# Altium PCB CSWrite3-SW-V1.1.PcbDoc
Units mm, origin at the board's own origin, x right, y up, seen from the top; angles counter-clockwise.
Board outline 100 x 80 mm, 4 copper layers (Top Layer, power, gnd, Bottom Layer), stack 0.778 mm thick; 11 components, 181 nets, 126 pads, 135 vias.
Unrouted connection lines stored in the file: 17.
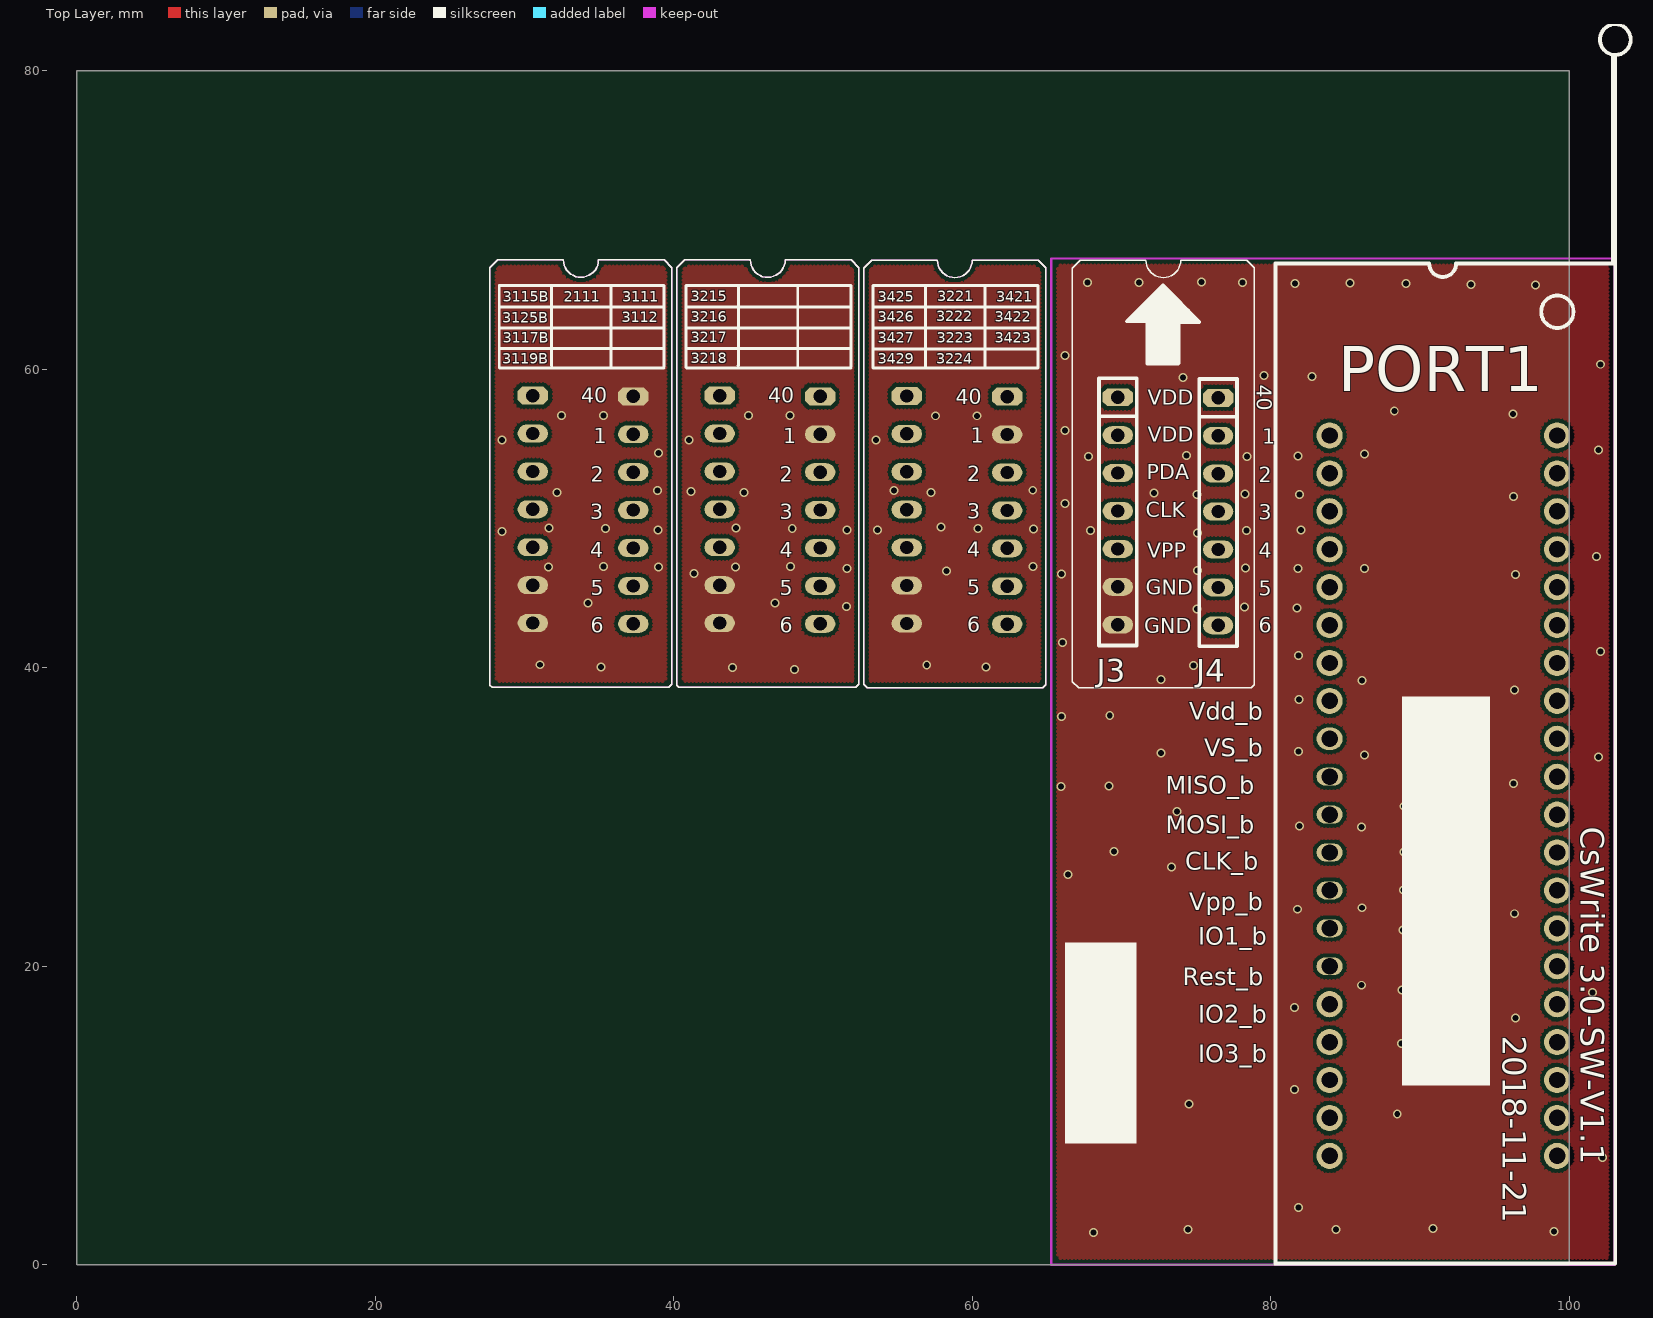
[diagram p0: Top Layer view]
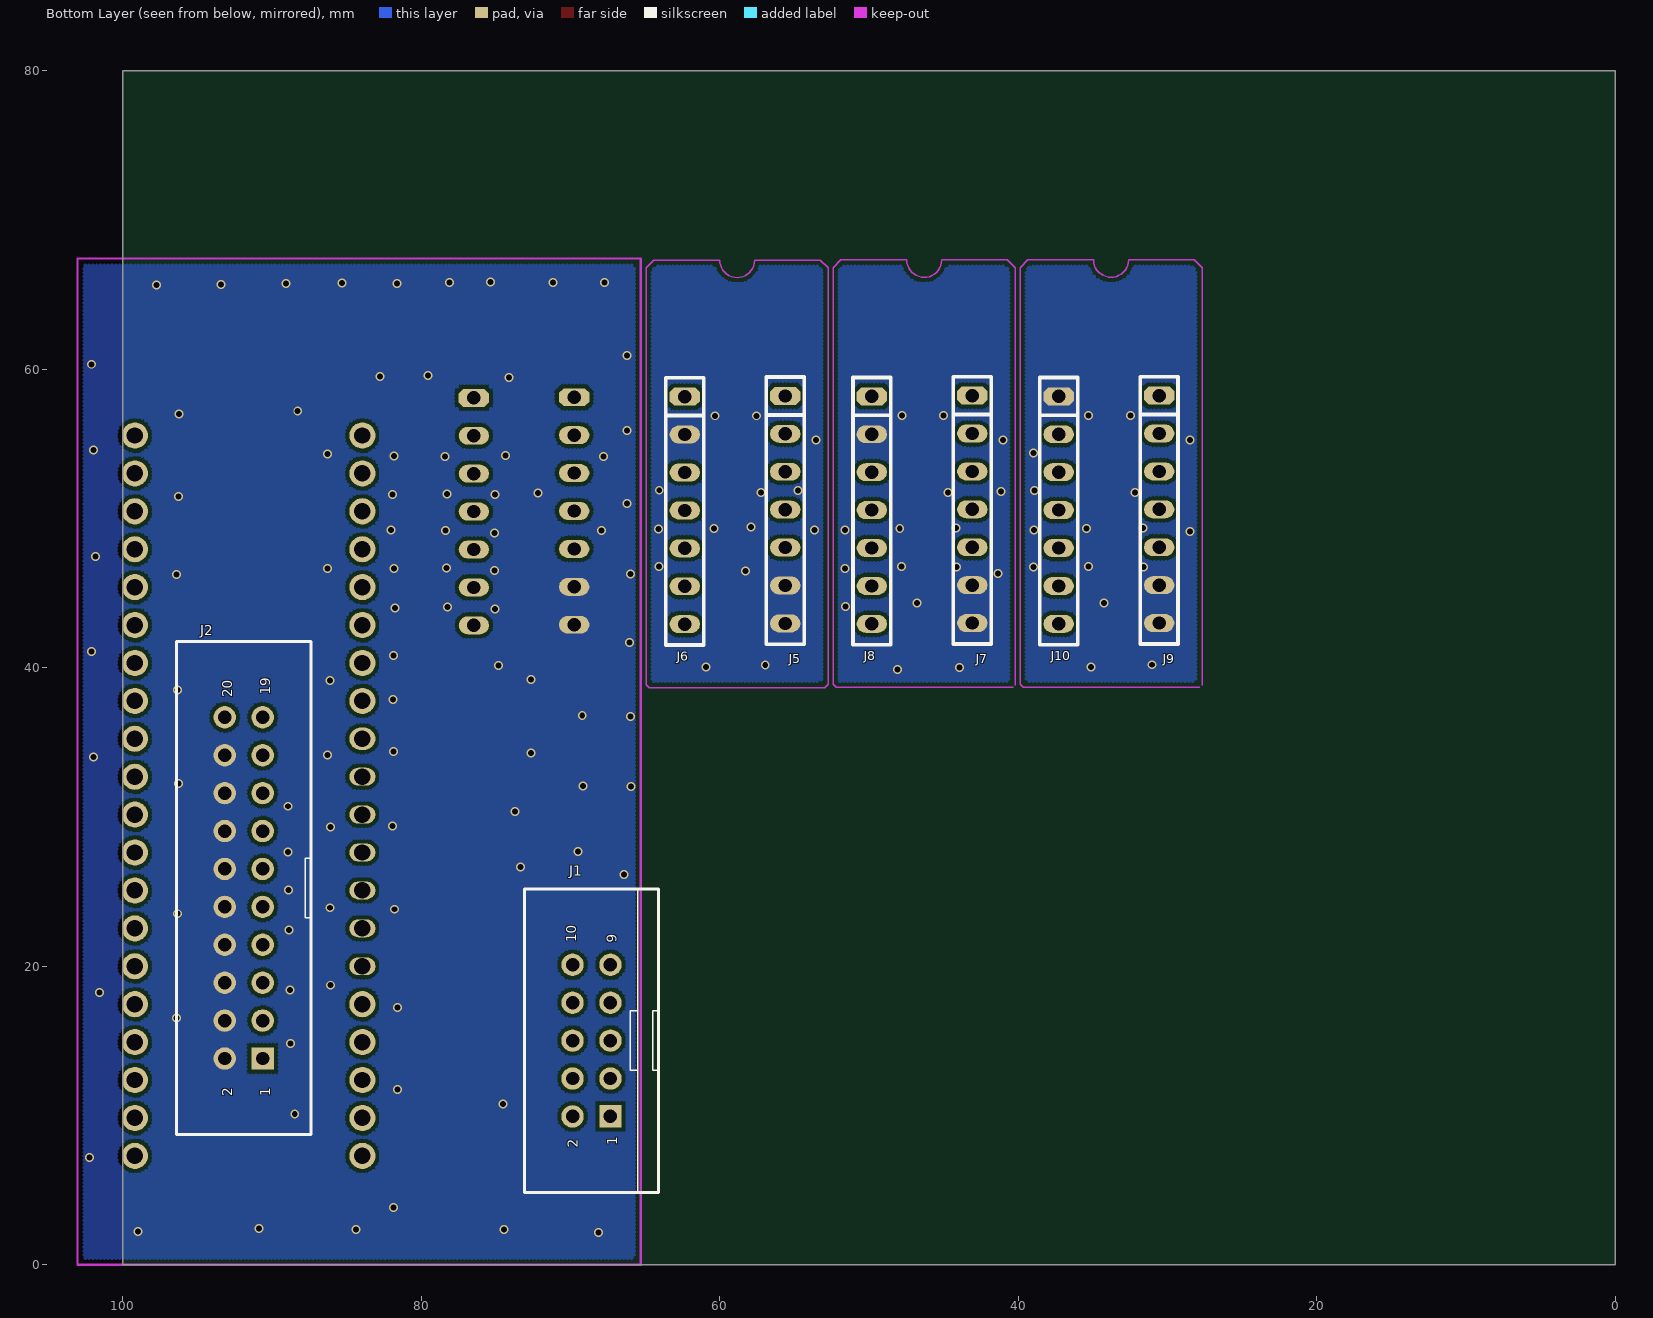
[diagram p1: Bottom Layer view, seen from below]
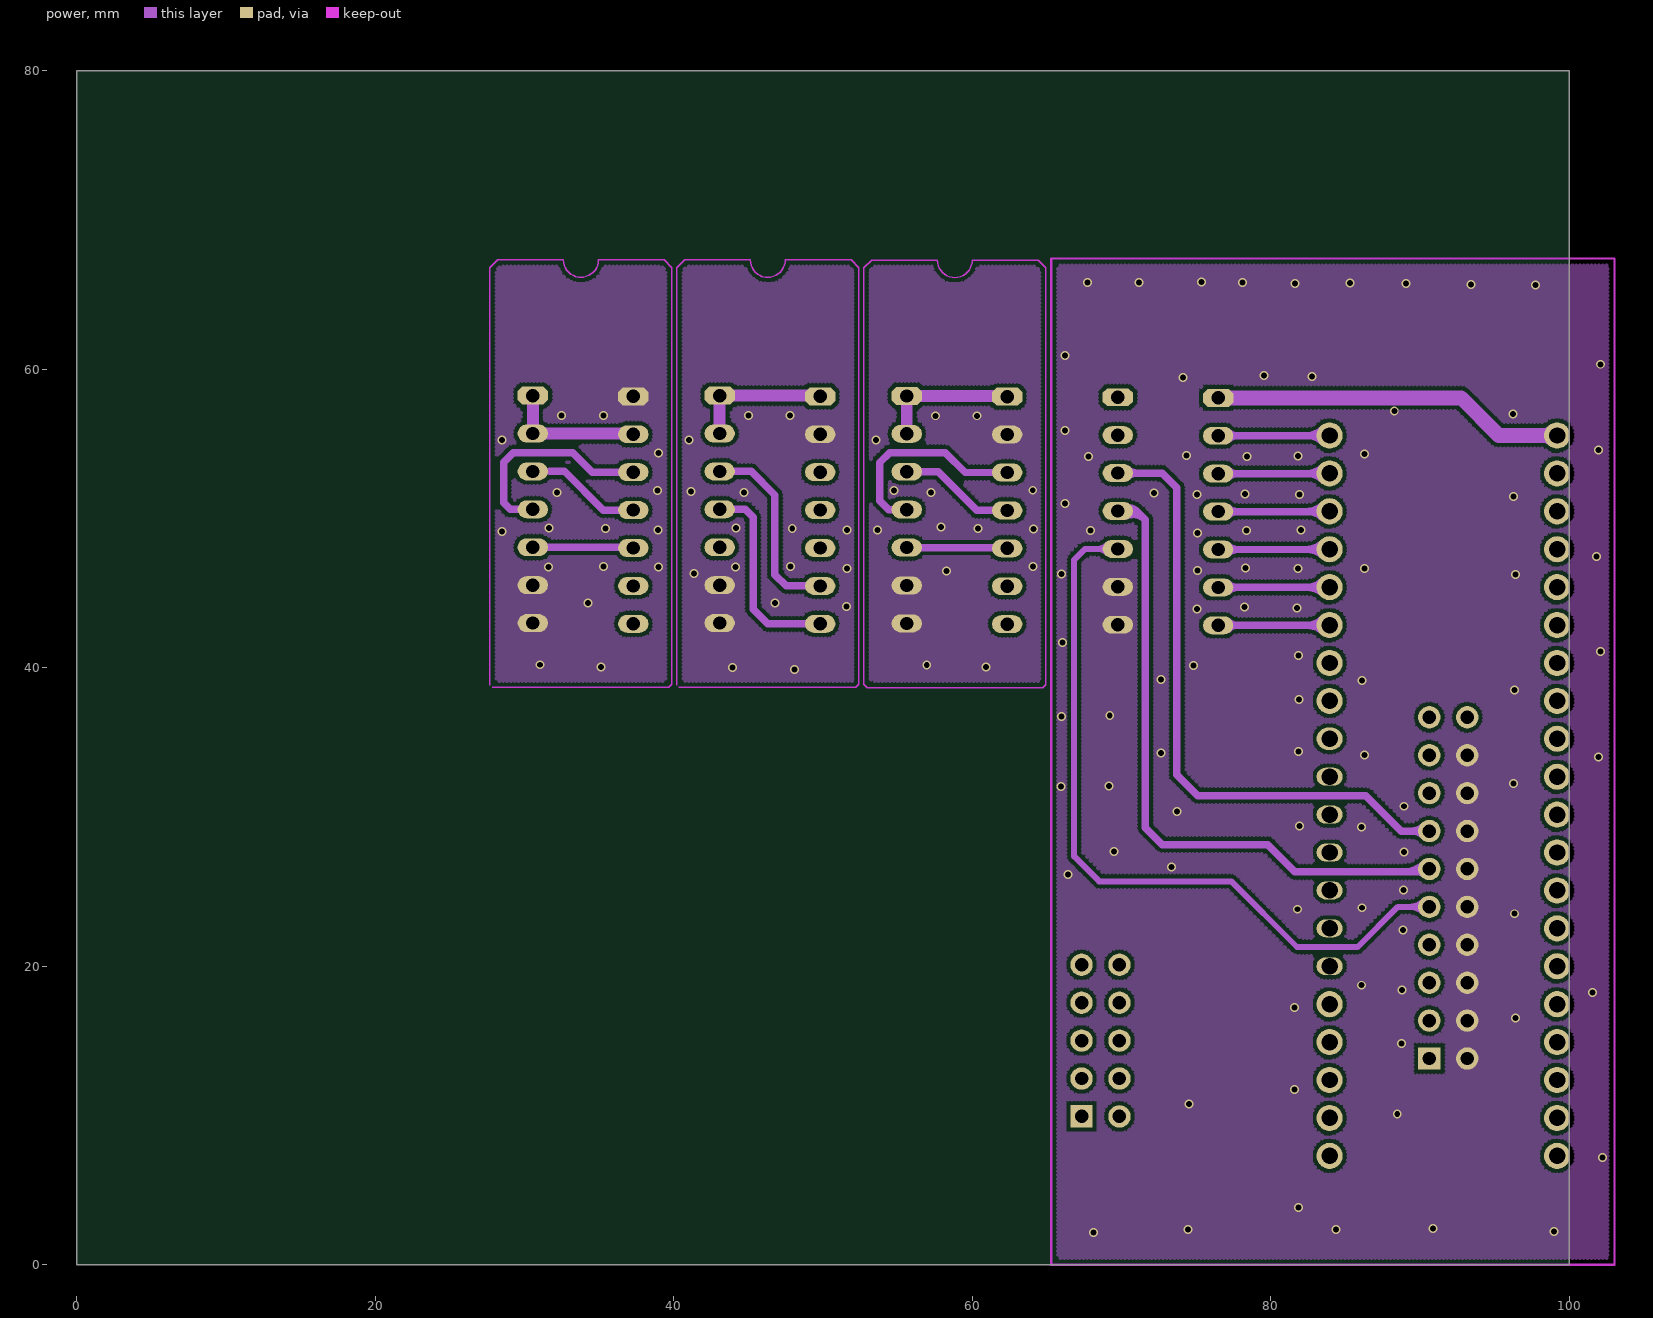
[diagram p2: power]
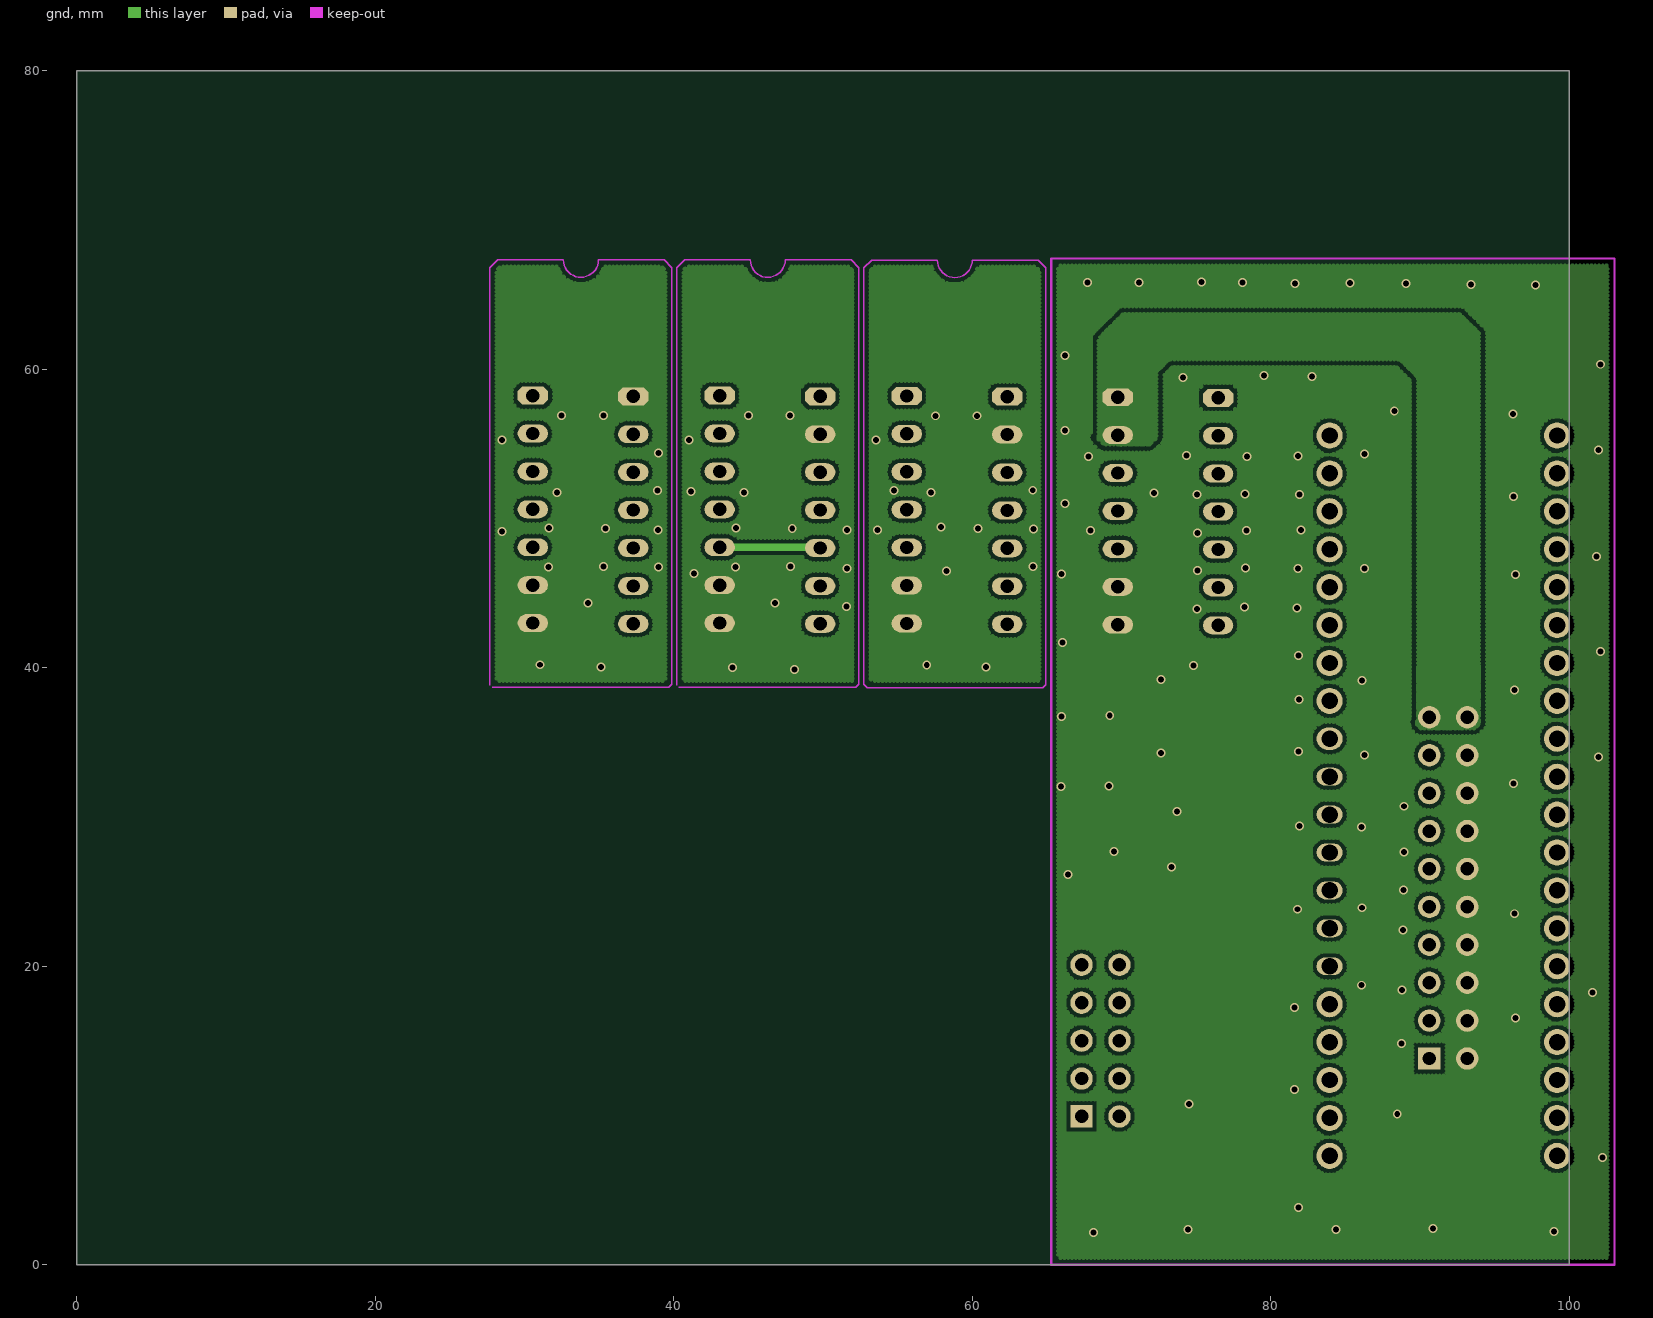
[diagram p3: gnd]

## Layer stack, top to bottom
Top Layer: signal copper 0.0356
Dielectric: core 0.254, FR-4, Dk 4.2
power: signal copper 0.036
Dielectric: prepreg 0.127, Dk 4.2
gnd: signal copper 0.036
Dielectric: core 0.254, Dk 4.2
Bottom Layer: signal copper 0.0356

## Board outline
0,0 100,0 100,80 0,80

## Design rules (kind name [scope] priority, off if disabled: settings)
Clearance [All] p1: gap=0.254
ComponentClearance [All] p1 off: gap=0 collisioncheckmode=3 verticalgap=0 showdistances=FALSE
HoleSize [All] p1: absolutevalues=TRUE maxlimit=7.5 minlimit=0.025 maxpercent=80.000 minpercent=20.000
HoleToHoleClearance [All] p1: gap=0 allowstackedmicrovias=TRUE
MinimumSolderMaskSliver [All] p1: minsoldermaskwidth=0
PlaneConnect [All] p1: planeconnectstyle=Direct reliefexpansion=0.508 reliefentries=4 reliefconductorwidth=0.254 reliefairgap=0.254
PolygonConnect [All] p1: connectstyle=Direct reliefconductorwidth=0.254 reliefentries=4 polygonreliefangle="45 Angle" airgapwidth=0.254
RoutingVias RoutingVias_1 [All] p1: holewidth=0.711 width=1.27 viastyle="Through Hole" minholewidth=0.3 minwidth=0.5 maxholewidth=0.711 maxwidth=1.27
RoutingVias [All] p2: holewidth=0.6 width=1 viastyle="Through Hole" minholewidth=0.4 minwidth=0.6 maxholewidth=10 maxwidth=10
SilkToSilkClearance [All] p1: silktosilkclearance=0
SilkscreenOverComponentPads [IsPad] p1: minsilkscreentomaskgap=0
SolderMaskExpansion [All] p1: expansion=0.102
Width [All] p1: maxlimit=10 minlimit=0.254 preferedwidth=0.4
21 further rules are at their usual default settings.

## Classes and differential pairs
component class "CSWrite3.0.1 V0.51": BAT+1 BAT-1 C5 DCin F1

## Components (designator, comment, footprint, x,y, rotation, side; value= is the part's Value field where it differs from the comment)
J1 "扩展口" IDC10-GZ 68.59,15.01 r90 bottom locked (schematic designator J2)
J2 "烧录口" IDC20 91.89,25.24 r90 bottom locked (schematic designator J3)
J3 "DIP7" SIP7 69.75,58.11 r270 top
J4 "DIP7" SIP7 76.47,58.07 r270 top
J5 "DIP7" SIP7 55.61,58.2 r270 bottom
J6 "DIP7" SIP7 62.34,58.15 r270 bottom
J7 "DIP7" SIP7 43.08,58.22 r270 bottom
J8 "DIP7" SIP7 49.81,58.17 r270 bottom
J9 "DIP7" SIP7 30.56,58.22 r270 bottom
J10 "DIP7" SIP7 37.29,58.17 r270 bottom
PORT1 "IC40" DIP40_A 91.56,31.42 r180 top locked

## Footprints (in the part's own frame and the unit in brackets; to place one, negate y for a bottom-side part, rotate by r counter-clockwise, add the part's x,y. Pads: shape width x height; smd on the part's side, far side on the other; paste and mask are expansions set on the pad)
DIP40_A [mm]
  round 1.75 hole 1.1: 1(-7.62,-24.13) 2(-7.62,-21.59) 3(-7.62,-19.05) 4(-7.62,-16.51) 5(-7.62,-13.97) 6(-7.62,-11.43) 7(-7.62,-8.89) 8(-7.62,-6.35) 9(-7.62,-3.81) 10(-7.62,-1.27) 11(-7.62,1.27) 12(-7.62,3.81) 13(-7.62,6.35) 14(-7.62,8.89) 15(-7.62,11.43) 16(-7.62,13.97) 17(-7.62,16.51) 18(-7.62,19.05) 19(-7.62,21.59) 20(-7.62,24.13) 21(7.62,24.13) 22(7.62,21.59) 23(7.62,19.05) 24(7.62,16.51) 25(7.62,13.97) 33(7.62,-6.35) 34(7.62,-8.89) 35(7.62,-11.43) 36(7.62,-13.97) 37(7.62,-16.51) 38(7.62,-19.05) 39(7.62,-21.59) 40(7.62,-24.13)
  oval 1.75x1.2 hole 1.1: 26(7.62,11.43) 27(7.62,8.89) 28(7.62,6.35) 29(7.62,3.81) 30(7.62,1.27) 31(7.62,-1.27)
  oval 1.75x1.5 hole 1.1: 32(7.62,-3.81)
  silkscreen extent -12.55,-51.68 11.24,31.35
IDC10-GZ [mm]
  rect 1.5x1.5 hole 0.9: 1(-5.08,-1.27)
  round 1.5 hole 0.9: 2(-5.08,1.27) 3(-2.54,-1.27) 4(-2.54,1.27) 5(0,-1.27) 6(0,1.27) 7(2.54,-1.27) 8(2.54,1.27) 9(5.08,-1.27) 10(5.08,1.27)
  silkscreen extent -10.17,-4.51 10.17,4.5, body extent -10.37,-4.52 10.23,4.28, height 9.1
IDC20 [mm]
  rect 1.5x1.5 hole 0.9: 1(-11.43,-1.27)
  round 1.5 hole 0.9: 2(-11.43,1.27) 3(-8.89,-1.27) 4(-8.89,1.27) 5(-6.35,-1.27) 6(-6.35,1.27) 7(-3.81,-1.27) 8(-3.81,1.27) 9(-1.27,-1.27) 10(-1.27,1.27) 11(1.27,-1.27) 12(1.27,1.27) 13(3.81,-1.27) 14(3.81,1.27) 15(6.35,-1.27) 16(6.35,1.27) 17(8.89,-1.27) 18(8.89,1.27) 19(11.43,-1.27) 20(11.43,1.27)
  silkscreen extent -16.52,-4.5 16.52,4.5
SIP7 [mil]
  oct 47.24x80 hole 35: 1(0,0)
  oval 47.24x80 hole 35: 2(100,0) 3(200,0) 4(300,0) 5(400,0) 6(500,0) 7(600,0)
  silkscreen extent -50,-50 655,50

## Part data
J1: library part Con5x2

## Via types
v1: diameter 0.6, hole 0.4, Top Layer to Bottom Layer, 135 vias

## Nets (pads, with @x,y where several pads share a name; then routed paths per layer and width w, separated by ;. In a path a pad name is that pad's centre, name@x,y a point inside that pad or via, vN(x,y) a via of type N, cw(c..) or ccw(c..) an arc to the next point about the centre after c; other vN are vias at no path point)
3.3V: J1.9
5V: 
5V-b: 
12V: 
AD-5V: 
AD-12V: 
AD-Pin1: 
AD-Pin2: 
AD-Pin3: 
AD-Pin4: 
AD-Pin5: 
AD-Pin6: 
AD-Pin7: 
AD-Pin8: 
AD-Vdd: 
AD-Vpp: 
AD-VS: 
AD-VS-b: 
AGND: 
BL: 
Boot0: 
Busy: 
Buzzer: 
CLK-a: 
CLK-b: 
D0: J4.2 PORT1.40 | length 11.1
  power w0.5: J4.2 PORT1.40@83.92,55.53 ; J4.2@77.133,55.283 cw(c77.731,54.685) 77.731,55.53 cw(c77.731,56.375) J4.2@77.133,55.777 ; 82.383,55.53 ccw(c82.383,57.107) PORT1.40@83.498,55.992 ; 82.479,55.53 cw(c82.479,54.089) PORT1.40@83.498,55.108
D1: J4.3 PORT1.39 | length 11.1
  power w0.5: J4.3 PORT1.39@83.92,52.99 ; J4.3@77.133,52.743 cw(c77.731,52.145) 77.731,52.99 cw(c77.731,53.835) J4.3@77.133,53.237 ; 82.383,52.99 ccw(c82.383,54.567) PORT1.39@83.498,53.452 ; 82.479,52.99 cw(c82.479,51.549) PORT1.39@83.498,52.568
D2: 
D3: J4.4 PORT1.38 | length 11.1
  power w0.5: J4.4 PORT1.38@83.92,50.45 ; J4.4@77.133,50.203 cw(c77.731,49.605) 77.731,50.45 cw(c77.731,51.295) J4.4@77.133,50.697 ; 82.383,50.45 ccw(c82.383,52.027) PORT1.38@83.498,50.912 ; 82.479,50.45 cw(c82.479,49.009) PORT1.38@83.498,50.028
D4: J4.5 PORT1.37 | length 11.1
  power w0.5: J4.5 PORT1.37@83.92,47.91 ; J4.5@77.133,47.663 cw(c77.731,47.065) 77.731,47.91 cw(c77.731,48.755) J4.5@77.133,48.157 ; 82.383,47.91 ccw(c82.383,49.487) PORT1.37@83.498,48.372 ; 82.479,47.91 cw(c82.479,46.469) PORT1.37@83.498,47.488
D5: J4.6 J6.6 PORT1.36 | length 11.1
  power w0.5: J4.6 PORT1.36@83.92,45.37 ; J4.6@77.133,45.123 cw(c77.731,44.525) 77.731,45.37 cw(c77.731,46.215) J4.6@77.133,45.617 ; 82.383,45.37 ccw(c82.383,46.947) PORT1.36@83.498,45.832 ; 82.479,45.37 cw(c82.479,43.929) PORT1.36@83.498,44.948
D6: J4.7 J6.7 PORT1.35 | length 11.1
  power w0.5: J4.7 PORT1.35@83.92,42.83 ; J4.7@77.133,42.583 cw(c77.731,41.985) 77.731,42.83 cw(c77.731,43.675) J4.7@77.133,43.077 ; 82.383,42.83 ccw(c82.383,44.407) PORT1.35@83.498,43.292 ; 82.479,42.83 cw(c82.479,41.389) PORT1.35@83.498,42.408
D7: J4.1 PORT1.1 | length 25.2
  power w1: J4.1 92.75,58.07 95.27,55.55 PORT1.1 ; PORT1.1@98.915,55.285 ccw(c98.275,54.645) 98.275,55.55 ccw(c98.275,56.455) PORT1.1@98.915,55.815
DA-Vdd: 
DA-Vpp: 
GND: J1.10
GND1: 
GND2: 
GndControl: 
I2C1-DAT: 
I2C1-SCL: 
I2C2-DAT: 
I2C2-SCL: 
IO1-a: 
IO1-b: J2.7
IO2-a: 
IO2-b: J2.3
IO3-a: 
IO3-b: J2.1
KeyMode: 
LCD-CS: 
LCD-DCX: 
LCD-RESET: 
LCD-SCK: 
LCD-SDI: 
LCD-SDO: 
LowPower: 
MISO-a: 
MISO-b: 
MOSI-a: 
MOSI-b: 
NetBusy1_1: 
NetBusy1_3: 
NetBusy1_4: 
NetBusy_1: 
NetBZ1_2: 
NetC1_2: 
NetC3_2: 
NetC5_2: 
NetC7_2: 
NetC8_2: 
NetC10_1: 
NetC11_1: 
NetC18_2: 
NetC27_2: 
NetC29_1: 
NetC31_1: 
NetC32_2: 
NetC37_1: 
NetC47_1: 
NetC56_2: 
NetC60_2: 
NetC63_1: 
NetC65_2: 
NetC66_2: 
NetD1_2: 
NetD2_1: 
NetDZ1_2: 
NetIC3_1: 
NetIC3_7: 
NetIC3_8: 
NetJ1_5: 
NetJ1_13: 
NetJ2_3: J1.7
NetJ2_4: J1.8
NetJ2_5: J1.5
NetJ2_6: J1.6
NetJ2_7: J1.3
NetJ2_8: J1.4
NetJ2_9: J1.1
NetJ2_10: J1.2
NetJ3_4: J2.2 J2.4 J2.6 J2.8 J2.10 J2.12 J2.14 J2.16 J2.18 J3.6 J3.7 J5.6 J5.7 J6.2 J7.6 J7.7 J8.2 J9.6 J9.7 J10.1
  other v1: 68.12,2.17 98.97,2.23 74.46,2.37 84.37,2.37 90.85,2.43 81.86,3.82 102.21,7.19 88.47,10.1 74.53,10.76 81.6,11.75 88.76,14.82 96.398,16.51 81.6,17.23 101.55,18.22 88.8,18.39 86.09,18.72 88.86,22.42 96.33,23.51 81.79,23.81 86.12,23.91 88.9,25.1 66.4,26.15 73.34,26.65 88.93,27.64 69.5,27.67 86.06,29.33 81.92,29.39 73.7,30.35 88.93,30.71 65.95,32.02 69.17,32.07 96.26,32.23 101.95,34.02 86.29,34.15 72.64,34.28 81.86,34.38 65.97,36.73 69.21,36.79 81.89,37.85 96.33,38.51 86.12,39.14 72.64,39.2 48.09,39.86 43.93,40 35.14,40.03 60.91,40.03 74.82,40.13 56.95,40.16 31.05,40.19 81.86,40.82 102.08,41.09 66.03,41.67 75.05,43.93 81.76,43.99 78.23,44.06 51.56,44.09 34.26,44.32 46.78,44.32 96.398,46.24 65.97,46.27 41.35,46.31 58.27,46.47 75.09,46.51 51.6,46.64 81.83,46.64 86.29,46.64 78.29,46.67 31.62,46.73 44.14,46.73 38.98,46.74 35.29,46.76 47.81,46.76 64.07,46.76 101.82,47.43 75.09,49.02 28.5,49.12 67.92,49.182 78.36,49.182 38.94,49.21 51.6,49.21 53.65,49.22 82.03,49.21 64.09,49.29 35.42,49.31 47.94,49.31 60.374,49.33 31.64,49.35 44.16,49.35 57.91,49.41 66.2,51 96.26,51.468 75.05,51.59 81.92,51.59 78.26,51.63 72.16,51.69 57.24,51.72 32.19,51.74 44.71,51.74 41.16,51.79 38.91,51.86 54.742,51.86 64.05,51.88 67.79,54.14 78.39,54.14 81.83,54.17 74.36,54.2 86.29,54.3 38.98,54.37 101.95,54.57 28.5,55.26 41.02,55.26 53.55,55.24 66.2,55.89 32.486,56.89 35.28,56.89 45.006,56.89 47.8,56.89 57.536,56.87 60.33,56.87 96.23,56.98 88.27,57.189 74.13,59.42 82.75,59.49 79.55,59.56 102.08,60.32 66.2,60.91 97.72,65.63 93.42,65.67 81.63,65.73 89.06,65.73 85.3,65.77 67.72,65.8 71.16,65.8 78.09,65.8 75.35,65.83
NetJ3_5: J2.15
NetJ3_7: J2.13 J3.3 J5.3 J6.4 J7.3 J8.6 J9.3 J10.4 | length 72.8
  power w0.5: 31.7,53.14 32.68,53.14 35.27,50.55 J10.4 ; J7.3 45.2,53.14 46.78,51.56 46.78,46.23 47.54,45.47 J8.6 ; J5.3 57.72,53.12 60.31,50.53 J6.4 ; J3.3 72.73,53.03 73.71,52.05 73.71,32.81 75.1,31.42 86.37,31.42 88.74,29.05 J2.13 ; J3.3@70.413,52.783 cw(c71.011,52.185) 71.011,53.03 cw(c71.011,53.875) J3.3@70.413,53.277 ; J2.13@90.266,28.696 ccw(c89.413,27.843) 89.413,29.05 ccw(c89.413,30.257) J2.13@90.266,29.404
NetJ3_9: J2.11 J3.4 J5.4 J6.3 J7.4 J8.7 J9.4 J10.3 | length 90.6
  power w0.5: J9.4 29.04,50.6 28.6,51.04 28.6,53.76 29.24,54.4 33.23,54.4 34.54,53.09 J10.3 ; J7.4 44.79,50.6 45.32,50.07 45.32,43.91 46.3,42.93 J8.7 ; J5.4 54.4,50.58 53.8,51.18 53.8,53.739 54.461,54.4 58.19,54.4 59.52,53.07 J6.3 ; J3.4 71.01,50.49 ; J3.4@70.109,50.629 cw(c70.443,49.821) 71.061,50.439 ; J3.4@70.3,50.167 cw(c70.753,49.073) 71.59,49.91 ; J3.4@70.414,50.243 cw(c71.01,49.647) 71.01,50.49 ; J3.4@70.414,50.737 ccw(c71.01,51.333) 71.01,50.49 ; 88.954,26.32 ccw(c88.954,28.176) J2.11@90.266,26.864 ; 89.872,26.32 cw(c89.872,25.762) J2.11@90.266,26.156 ; J2.11 90.1,26.51 89.91,26.32 81.61,26.32 79.79,28.14 72.72,28.14 71.59,29.27 71.59,49.91 ; 71.01,50.49 71.59,49.91
NetJ3_15: J2.5
NetJ4_2: 
NetJ4_4: 
NetJ4_7: 
NetJ4_8: 
NetL6_3: 
NetL6_4: 
NetL8_1: 
NetL9_1: 
NetL10_1: 
NetL11_2: 
NetLCD1_11: 
NetLCD1_12: 
NetLCD1_13: 
NetLCD1_14: 
NetNG1_1: 
NetNG1_4: 
NetOK1_1: 
NetOK1_4: 
NetPOWER_1: 
NetQ2_1: 
NetQ2_2: 
NetQ4_1: 
NetQ4_2: 
NetQ5_2: 
NetQ6_1: 
NetQ6_3: 
NetQ9_2: 
NetQ10_1: 
NetQ10_3: 
NetQ13_1: 
NetQ13_3: 
NetQ15_1: 
NetQ15_3: 
NetQ18_1: 
NetQ18_3: 
NetR6_2: 
NetR7_2: 
NetR20_2: 
NetR28_2: 
NetR54_2: 
NetR57_2: 
NetR62_2: 
NetR65_2: 
NetR68_2: 
NetR72_2: 
NetR73_2: 
NetRP9_1: 
NG: 
OE: 
OK: 
Rest: 
Rest-a: 
Rest-b: 
Rx: 
SPI2-CLK: 
SPI2-CS: 
SPI2-MISO: 
SPI2-MOSI: 
Start: 
SWCLK: 
SWDIO: 
Tx: 
USBDM: 
USBDP: 
USBEN: 
Vdd: 
Vdd-b: J2.19 J2.20 J3.1 J3.2 J5.1 J5.2 J6.1 J7.1 J7.2 J8.1 J9.1 J9.2 J10.2 | length 27.7
  power w0.8: J9.1 J9.2 J10.2@37.24,55.68 ; J7.2 J7.1 J8.1@49.76,58.22 ; J5.2 J5.1 J6.1@62.29,58.2
VddOn: 
Vpp: 
Vpp-b: J2.9 J3.5 J5.5 J6.5 J7.5 J8.5 J9.5 J10.5 | length 74.2
  power w0.4: J3.5@69.051,47.667 ccw(c68.368,46.984) 68.368,47.95 ccw(c68.368,48.916) J3.5@69.051,48.233 ; J3.5 67.56,47.95 66.83,47.22 66.83,27.35 68.5,25.68 77.35,25.68 81.75,21.28 85.82,21.28 88.51,23.97 J2.9 ; J2.9@90.231,23.581 ccw(c89.292,22.642) 89.292,23.97 ccw(c89.292,25.298) J2.9@90.231,24.359
  power w0.5: J9.5 J10.5@37.24,48.06 ; J5.5 J6.5@62.29,48.04
  gnd w0.5: J7.5 J8.5@49.76,48.06
VppOn: 
VREF: 
VS-b: J2.17
VSOn: 
VSOn-b: 
pads on no net: J8.3 J8.4 J10.6 J10.7 PORT1.2 PORT1.3 PORT1.4 PORT1.5 PORT1.6 PORT1.7 PORT1.8 PORT1.9 PORT1.10 PORT1.11 PORT1.12 PORT1.13 PORT1.14 PORT1.15 PORT1.16 PORT1.17 PORT1.18 PORT1.19 PORT1.20 PORT1.21 PORT1.22 PORT1.23 PORT1.24 PORT1.25 PORT1.26 PORT1.27 PORT1.28 PORT1.29 PORT1.30 PORT1.31 PORT1.32 PORT1.33 PORT1.34

## Polygon pours and split planes (outlines as drawn)
NetJ3_4 on gnd "TopLayer-No Net" (hatched 90Degree grid 0.254 track 0.254, remove dead copper, pour order 48): 27.69,38.81 27.69,66.784 28.218,67.312 28.29,67.24 36.77,67.24 52.09,67.24 52.22,67.11 52.42,66.91 52.42,65.25 52.42,39.111 51.969,38.66 51.899,38.59 28.08,38.59
NetJ3_4 on gnd "TopLayer-No Net" (hatched 90Degree grid 0.254 track 0.254, remove dead copper, pour order 32): 53.11,38.69 52.74,39.06 52.77,39.09 52.77,46.8 52.77,66.794 53.268,67.292 53.46,67.1 62.45,67.1 64.298,67.1 64.75,66.648 64.81,66.588 64.81,64.52 64.81,38.74 64.72,38.65 53.29,38.65
NetJ3_4 on gnd "TopLayer-No Net" (hatched 90Degree grid 0.254 track 0.254, remove dead copper, pour order 22): 65.292,0 65.292,67.281 65.72,67.71 65.81,67.62 76.17,67.62 102.352,67.62 102.9,67.072 103.25,66.722 103.25,63.34 103.25,0.09 102.44,-0.72 102.18,-0.46 65.81,-0.46
Vdd-b on gnd "TopLayer-No Net" (hatched 90Degree grid 0.254 track 0.254, remove dead copper, pour order 8): 89.76,36.35 89.84,36.43 89.84,49.84 89.84,59.45 89.16,60.13 88.65,60.64 77.2,60.64 73.18,60.64 72.45,59.91 72.36,59.82 72.36,57.34 72.36,55.41 71.93,54.98 71.89,54.94 69.7,54.94 68.8,54.94 68.33,55.41 68.46,55.54 68.46,58.5 68.46,62.05 69.19,62.78 70.09,63.68 75.49,63.68 92.67,63.68 93.87,62.48 93.96,62.39 93.96,48.47 93.96,36.28 93.79,36.11 93.6,35.92 92.76,35.92 90.05,35.92 89.8,36.17
NetJ3_4 on Top Layer "TopLayer-No Net" (hatched 90Degree grid 0.254 track 0.254, remove dead copper, pour order 44): 27.89,39.82 27.89,67 28.21,67.32 28.26,67.37 49.84,67.37 51.83,67.37 52.4,66.8 52.48,66.72 52.48,38.66 27.96,38.66 27.76,38.46
NetJ3_4 on Top Layer "TopLayer-No Net" (hatched 90Degree grid 0.254 track 0.254, remove dead copper, pour order 34): 53.14,38.66 52.74,39.06 52.74,40.81 52.74,66.764 53.268,67.292 59.4,67.292 64.298,67.292 64.73,66.86 64.86,66.73 64.86,65.84 64.86,38.79 64.72,38.65 53.15,38.65
NetJ3_4 on Top Layer "TopLayer-No Net" (hatched 90Degree grid 0.254 track 0.254, remove dead copper, pour order 18): 65.12,0.27 65.12,67.2 65.46,67.54 65.72,67.8 94.6,67.8 102.48,67.8 102.74,67.54 103.25,67.03 103.25,54.94 103.25,0.23 103.02,0 102.6,-0.42 65.63,-0.42
NetJ3_4 on power "TopLayer-No Net" (hatched 90Degree grid 0.254 track 0.254, remove dead copper, pour order 46): 27.82,39.62 27.76,39.68 27.76,66.47 27.76,66.8 28.4,67.44 28.46,67.5 37.55,67.5 51.7,67.5 52.4,66.8 52.42,66.78 52.42,56.04 52.42,38.47 52.03,38.08 51.84,38.27 27.89,38.27
NetJ3_4 on power "TopLayer-No Net" (hatched 90Degree grid 0.254 track 0.254, remove dead copper, pour order 30): 52.74,39.06 52.74,66.43 53.42,67.11 53.45,67.08 62.65,67.08 64.3,67.08 64.75,66.63 64.88,66.5 64.88,63.51 64.88,38.81 64.72,38.65 64.71,38.66 53.14,38.66
NetJ3_4 on power "TopLayer-No Net" (hatched 90Degree grid 0.254 track 0.254, remove dead copper, pour order 20): 65.292,0.1 65.292,67.031 65.46,67.2 65.54,67.28 70.95,67.28 102.4,67.28 103,66.68 103,60.258 103,-0.07 102.4,-0.67 102.15,-0.42 65.72,-0.42
NetJ3_4 on Bottom Layer "TopLayer-No Net" (hatched 90Degree grid 0.254 track 0.254, remove dead copper, pour order 50): 27.63,38.59 27.63,66.724 28.218,67.312 28.226,67.32 39.36,67.32 51.76,67.32 52.16,66.92 52.48,66.6 52.48,51.79 52.48,38.721 51.969,38.21 27.89,38.21
NetJ3_4 on Bottom Layer "TopLayer-No Net" (hatched 90Degree grid 0.254 track 0.254, remove dead copper, pour order 28): 52.91,38.83 52.91,66.95 53.26,67.3 53.28,67.32 61.95,67.32 64.39,67.32 64.93,66.78 64.99,66.72 64.99,61.41 64.99,38.92 64.77,38.7 64.64,38.57 53.47,38.57
NetJ3_4 on Bottom Layer "TopLayer-No Net" (hatched 90Degree grid 0.254 track 0.254, remove dead copper, pour order 24): 65.21,-0.76 65.21,67.32 65.3,67.41 65.34,67.45 82.69,67.45 102.98,67.45 103.02,67.41 103.17,67.26 103.17,55.2 103.17,0.18 102.7,-0.29 102.06,-0.93 65.98,-0.93
no net on Top Overlay "TopLayer-No Net" (hatched 90Degree grid 0.254 track 0.254, remove dead copper): 72.776,65.6 70.375,63.199 70.339,63.199 71.743,63.199 71.743,60.369 73.791,60.369 73.821,60.399 73.821,63.159 75.201,63.159 72.75,65.61

## Keep-outs
Keep-Out Layer:
  lines w0.1: 27.69,38.81 27.69,39.08 27.69,66.8 28.21,67.32 ; 27.83,38.68 39.68,38.68 39.88,38.88 39.88,66.8 39.36,67.32 34.95,67.32 cw(c33.781,67.312) 32.612,67.312 28.218,67.312 ; 40.21,38.81 40.21,39.08 40.21,66.8 40.73,67.32 ; 40.35,38.68 52.2,38.68 52.4,38.88 52.4,66.8 51.88,67.32 47.47,67.32 cw(c46.301,67.312) 45.132,67.312 40.738,67.312 ; 53.26,67.3 52.74,66.78 52.74,38.89 52.97,38.66 64.73,38.66 64.93,38.86 64.93,66.78 64.41,67.3 60,67.3 cw(c58.831,67.292) 57.662,67.292 53.268,67.292
  lines w0.15: 65.292,67.41 65.292,0 ; 65.3,67.41 103.02,67.41 103.02,0 65.292,0 ; 100,0 65.292,0

## Silkscreen, mask and mechanical layers (free items; w line width, h text height)
Top Overlay:
  rectangle: 66.195,8.11 70.985,21.59
  rectangle: 88.8,12.01 94.68,38.05
  lines w0.1: 27.69,38.81 27.83,38.67 39.67,38.67 39.88,38.88 39.88,66.8 39.36,67.32 34.95,67.32 cw(c33.781,67.312) 32.612,67.312 28.218,67.312 27.69,66.784 27.69,38.81 ; 40.21,38.81 40.21,66.784 40.738,67.312 45.132,67.312 ccw(c46.301,67.312) 47.47,67.32 51.88,67.32 52.4,66.8 52.4,38.88 52.19,38.67 40.35,38.67 40.21,38.81 ; 52.74,38.89 52.98,38.65 64.72,38.65 64.93,38.86 64.93,66.78 64.41,67.3 60,67.3 cw(c58.831,67.292) 57.662,67.292 53.268,67.292 52.74,66.764 52.74,38.89 ; 66.71,39.06 66.71,66.764 67.238,67.292 71.632,67.292 ccw(c72.801,67.292) 73.97,67.3 78.38,67.3 78.9,66.78 78.9,38.86 78.69,38.65 67.12,38.65 66.71,39.06
  lines w0.2: 28.31,62.76 39.353,62.76 ; 28.35,64.17 39.3,64.17 ; 28.37,61.37 39.23,61.37 ; 31.8,60.23 31.82,60.25 31.82,65.6 ; 35.788,60.198 35.788,65.57 ; 39.344,60.08 28.331,60.08 28.31,60.101 28.31,65.61 39.347,65.61 39.347,60.157 ; 40.83,62.76 51.873,62.76 ; 40.87,64.17 51.82,64.17 ; 40.89,61.37 51.75,61.37 ; 44.32,60.23 44.34,60.25 44.34,65.6 ; 48.308,60.198 48.308,65.57 ; 51.864,60.08 40.851,60.08 40.83,60.101 40.83,65.61 51.867,65.61 51.867,60.157 ; 53.36,62.74 64.403,62.74 ; 53.4,64.15 64.35,64.15 ; 53.42,61.35 64.28,61.35 ; 56.85,60.21 56.87,60.23 56.87,65.57 ; 60.838,60.178 60.838,65.55 ; 64.394,60.06 53.381,60.06 53.36,60.081 53.36,65.59 64.397,65.59 64.397,60.137 ; 70.339,63.199 72.75,65.61 75.201,63.159 73.821,63.159 73.821,60.399 73.791,60.369 71.743,60.369 71.743,63.199 70.339,63.199
  text "3221" at 57.64,64.54 h0.7
  text "3115B" at 28.56,64.52 h0.7
  text "3215" at 41.15,64.53 h0.7
  text "3421" at 61.59,64.52 h0.7
  text "2111" at 32.62,64.51 h0.7
  text "3111" at 36.55,64.51 h0.7
  text "3425" at 53.68,64.51 h0.7
  text "3216" at 41.13,63.18 h0.7
  text "3222" at 57.6,63.19 h0.7
  text "3422" at 61.51,63.17 h0.7
  text "3426" at 53.66,63.16 h0.7
  text "3112" at 36.51,63.12 h0.7
  text "3125B" at 28.5,63.1 h0.7
  text "3217" at 41.15,61.786 h0.7
  text "3117B" at 28.55,61.75 h0.7
  text "3427" at 53.68,61.766 h0.7
  text "3223" at 57.61,61.75 h0.7
  text "3423" at 61.5,61.766 h0.7
  text "3218" at 41.13,60.38 h0.7
  text "3119B" at 28.51,60.36 h0.7
  text "3429" at 53.66,60.36 h0.7
  text "3224" at 57.58,60.358 h0.7
  text "40" at 79.06,58.96 h1 r270
  text "40" at 33.8,57.74 h1
  text "40" at 46.32,57.74 h1
  text "40" at 58.89,57.65 h1
  text "VDD" at 71.76,57.6 h1
  text "VDD" at 71.76,55.13 h1
  text "1" at 59.89,55.064 h1
  text "1" at 34.65,55.024 h1
  text "1" at 47.33,55.024 h1
  text "1" at 79.42,55.003 h1
  text "PDA" at 71.68,52.628 h1
  text "2" at 59.67,52.491 h1
  text "2" at 34.43,52.451 h1
  text "2" at 47.11,52.451 h1
  text "2" at 79.2,52.43 h1
  text "CLK" at 71.632,50.06 h1
  text "3" at 59.65,49.962 h1
  text "3" at 34.41,49.922 h1
  text "3" at 47.09,49.922 h1
  text "3" at 79.18,49.901 h1
  text "4" at 59.65,47.421 h1
  text "4" at 34.41,47.381 h1
  text "4" at 47.09,47.381 h1
  text "VPP" at 71.72,47.358 h1
  text "4" at 79.18,47.36 h1
  text "5" at 59.67,44.881 h1
  text "GND" at 71.61,44.89 h1
  text "5" at 34.43,44.841 h1
  text "5" at 47.11,44.841 h1
  text "5" at 79.2,44.82 h1
  text "6" at 59.67,42.381 h1
  text "6" at 34.43,42.341 h1
  text "6" at 47.11,42.341 h1
  text "6" at 79.2,42.32 h1
  text "GND" at 71.506,42.3 h1
  text "Vdd_b" at 74.55,36.11 h2
  text "VS_b" at 75.547,33.67 h2
  text "MISO_b" at 72.97,31.13 h2
  text "CsWrite 3.0-SW-V1.1" at 100.76,29.33 h1.6 r270
  text "MOSI_b" at 72.97,28.51 h2
  text "CLK_b" at 74.282,26.05 h2
  text "Vpp_b" at 74.55,23.34 h2
  text "IO1_b" at 75.124,21.04 h2
  text "Rest_b" at 74.096,18.33 h2
  text "IO2_b" at 75.124,15.82 h2
  text "2018-11-21" at 95.54,15.32 h1.6 r270
  text "IO3_b" at 75.124,13.15 h2
Bottom Overlay:
  lines w0.1: 65.5,4.93 65.5,25.13 ; 65.52,13.02 65.98,13.02 65.99,13.03 65.99,17 66,17.01 65.54,17.01

## Text inside footprints (layer, text, board x,y; h text height)
J1: Bottom Overlay "10" at 69.61,21.6 h0.65 r270; Bottom Overlay "9" at 66.89,21.57 h0.65 r270; Bottom Overlay "1" at 66.85,8 h0.65 r270; Bottom Overlay "2" at 69.52,7.84 h0.65 r270
J2: Bottom Overlay "20" at 92.65,38.02 h0.65 r270; Bottom Overlay "19" at 90.112,38.194 h0.65 r270; Bottom Overlay "1" at 90.112,11.27 h0.65 r270; Bottom Overlay "2" at 92.652,11.27 h0.65 r270